# Altium PCB ToF_Sensor_Hub.PcbDoc
Units mm, origin at the board's own origin, x right, y up, seen from the top; angles counter-clockwise.
Board outline 30 x 30 mm, 2 copper layers (Top Layer, Bottom Layer); 24 components, 16 nets, 89 pads, 67 vias.
Unrouted connection lines stored in the file: 8.
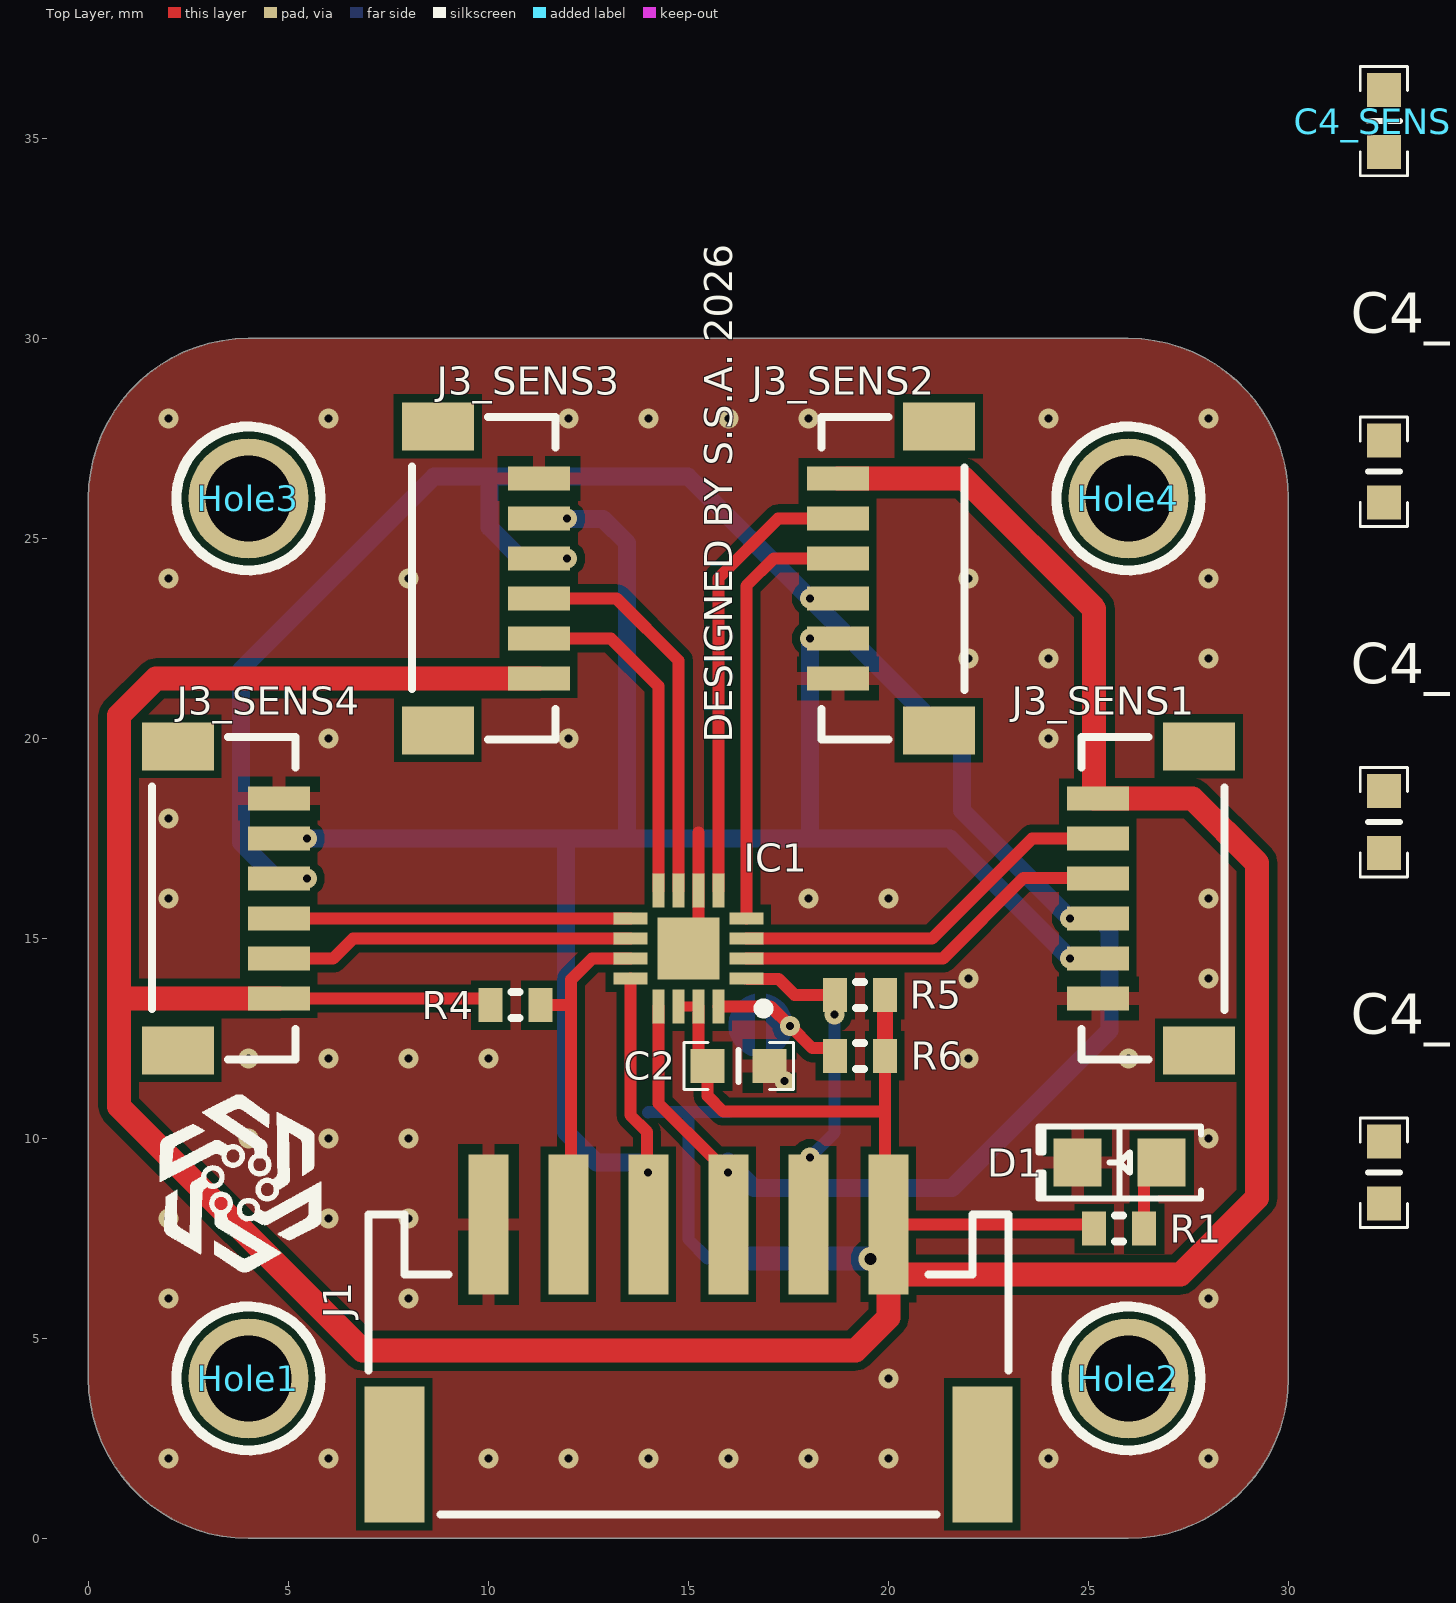
[diagram p0: Top Layer view]
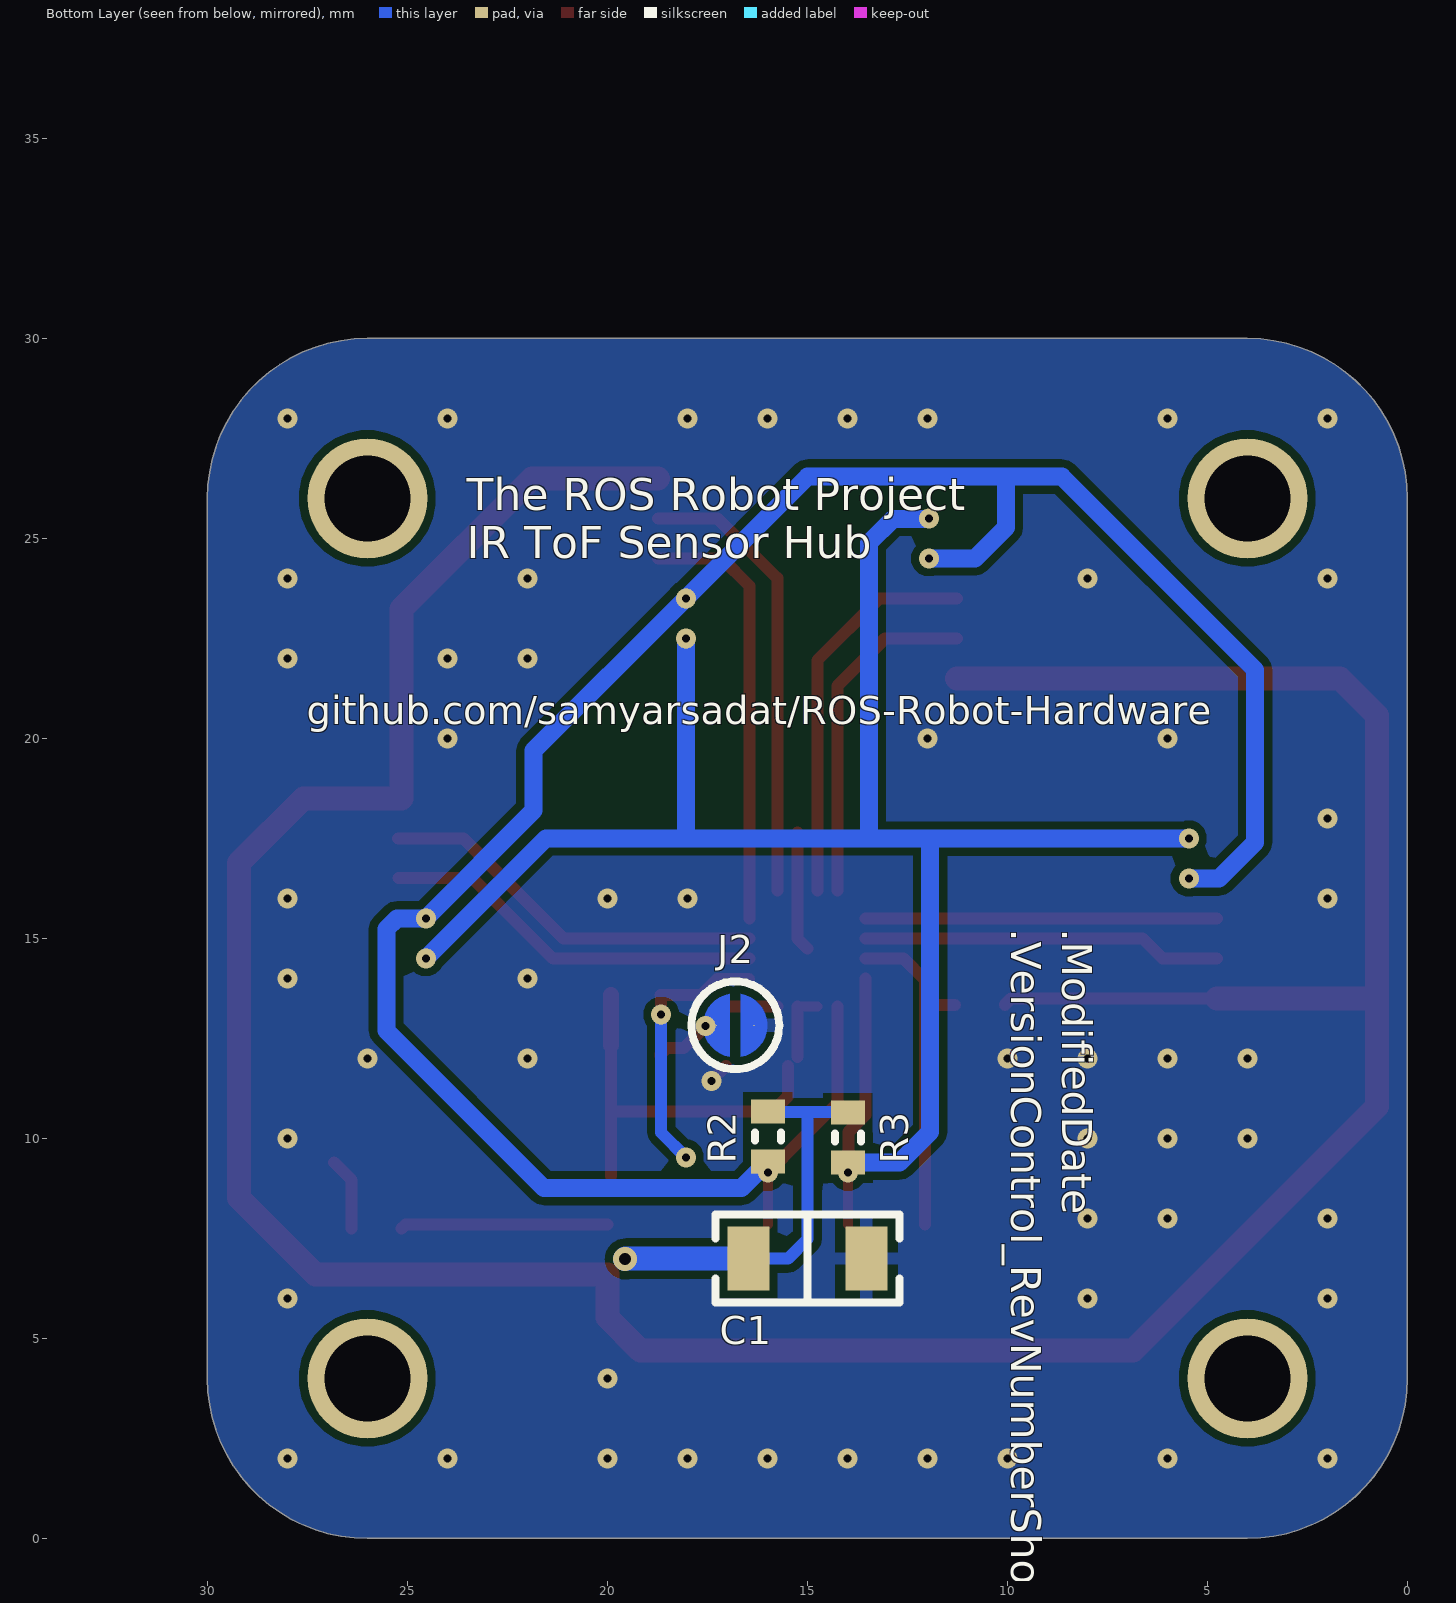
[diagram p1: Bottom Layer view, seen from below]

## Layer stack, top to bottom
Top Solder: solder mask 0.0102, Solder Resist, Dk 3.5
Top Layer: signal copper 0.0356
Dielectric 1: dielectric 0.32, FR-4, Dk 4.8
Bottom Layer: signal copper 0.0356
Bottom Solder: solder mask 0.0102, Solder Resist, Dk 3.5

## Board outline
4,0 cw(c4,4) 0,4 0,26 cw(c4,26) 4,30 26,30 cw(c26,26) 30,26 30,4.064 30,4 cw(c26,4) 26,0

## Design rules (kind name [scope] priority, off if disabled: settings)
BoardOutlineClearance [All] p1: gap=0.2 ignorepadtopadclearanceinfootprint=FALSE except(0: Fill-OutlineEdge Fill-CavityEdge Fill-CutoutEdge Fill-SplitBarrior Fill-SplitContinuation Poly-OutlineEdge Poly-CavityEdge Poly-CutoutEdge Poly-SplitBarrior Poly-SplitContinuation Region-OutlineEdge Region-CavityEdge Region-CutoutEdge Region-SplitBarrior Region-SplitContinuation; 0.15: Text-OutlineEdge Text-CavityEdge Text-CutoutEdge Text-SplitBarrior Text-SplitContinuation)
Clearance "Stitching GND" [IsStitchingVia and InNet('GND') vs (IsVia and (Not IsStitchingVia)) Or IsPad] p1: gap=0.2 ignorepadtopadclearanceinfootprint=FALSE except(0.28: Arc-Hole Track-Hole)
Clearance [All] p2: gap=0.2 ignorepadtopadclearanceinfootprint=TRUE except(0.28: Arc-Hole Track-Hole)
DiffPairsRouting [All] p1: maxlimit=0.254 minlimit=0.254 mostfreqgap=0.254 toplayer_minwidth=0.381 toplayer_maxwidth=0.5 toplayer_prefwidth=0.4 bottomlayer_minwidth=0.381 bottomlayer_maxwidth=0.5 bottomlayer_prefwidth=0.4 maxuncoupledlength=12.7
HoleSize [All] p1: absolutevalues=TRUE maxlimit=6 minlimit=0.15 maxpercent=80.000 minpercent=20.000
HoleToHoleClearance [All] p1: gap=0.2 allowstackedmicrovias=TRUE
MinimumAnnularRing MinimumViaAnnularRing [IsVia] p1: minimumring=0.15
MinimumAnnularRing [All] p2: minimumring=0.2
MinimumSolderMaskSliver [Not HasCompParameter('FinePitchPads')] p1: minsoldermaskwidth=0.1
PlaneConnect [All] p1: planeconnectstyle=Relief reliefexpansion=0.508 reliefentries=4 reliefconductorwidth=0.32 reliefairgap=0.254
PolygonConnect GNDStitchingDirect [InNet('GND')] p1: thpad.connectstyle=Relief thpad.reliefconductorwidth=0.32 thpad.reliefentries=4 thpad.polygonreliefangle="90 Angle" thpad.airgapwidth=0.254 thpad.conductorbypadedge=TRUE thpad.mindistance=0.381 thpad.enablemindistance=FALSE smdpad.connectstyle=Relief smdpad.reliefconductorwidth=0.32 smdpad.reliefentries=4 smdpad.polygonreliefangle="90 Angle" smdpad.airgapwidth=0.254 smdpad.conductorbypadedge=TRUE smdpad.mindistance=0.381 smdpad.enablemindistance=FALSE via.connectstyle=Direct via.reliefconductorwidth=0.254 via.reliefentries=4 via.polygonreliefangle="90 Angle" via.airgapwidth=0.254
PolygonConnect [All] p2: connectstyle=Relief reliefconductorwidth=0.32 reliefentries=4 polygonreliefangle="90 Angle" conductorbypadedge=TRUE mindistance=0.381 enablemindistance=FALSE airgapwidth=0.254
RoutingVias [All] p1: holewidth=0.4 width=0.8 viastyle="Through Hole" minholewidth=0.2 minwidth=0.5 maxholewidth=0.8 maxwidth=1.5
SilkToSilkClearance [All] p1: silktosilkclearance=0.1
SilkToSolderMaskClearance [IsPad] p1: minsilkscreentomaskgap=0.1 clearancetoexposedcopper=TRUE
SolderMaskExpansion [All] p1: expansion=0.04 istentingtop=FALSE
SupplyNets "Schematic Supply Nets" [InNet('+3V3')] p1: voltage=3.300
SupplyNets "Schematic Supply Nets_1" [InNet('GND')] p2: voltage=0.000
UnRoutedNet [All] p1: checkbadconnections=TRUE
Width [All] p1: maxlimit=1.4 minlimit=0.254 preferedwidth=0.6
22 further rules are at their usual default settings.

## Classes and differential pairs
channel class Sensor_Connector: SENS1 SENS2 SENS3 SENS4
component class SENS4: C4_SENS4 J3_SENS4
component class SENS3: C4_SENS3 J3_SENS3
component class SENS2: C4_SENS2 J3_SENS2
component class SENS1: C4_SENS1 J3_SENS1
component class ToF_Sensor_Hub: C1 C2 D1 Hole1 Hole2 Hole3 Hole4 IC1 J1 J2 R1 R2 R3 R4 R5 R6

## Components (designator, comment, footprint, x,y, rotation, side; value= is the part's Value field where it differs from the comment)
C1 "100uF" "MURATA CAP GRM31C 1206_3216" 15,7 r0 bottom
C2 "100nF" CAP_SMD_603 16.256,11.811 r180 top
C4_SENS1 "1uF" CAP_SMD_603 32.385,9.144 r90 top (schematic designator C4)
C4_SENS2 "1uF" CAP_SMD_603 32.385,17.907 r90 top (schematic designator C4)
C4_SENS3 "1uF" CAP_SMD_603 32.385,26.67 r90 top (schematic designator C4)
C4_SENS4 "1uF" CAP_SMD_603 32.385,35.433 r90 top (schematic designator C4)
D1 "LED" "LED 0805_2012 RED" 25.781,9.398 r180 top
Hole1 "Hole" Hole_2mm 4,4 r0 top locked
Hole2 "Hole" Hole_2mm 26,4 r0 top locked
Hole3 "Hole" Hole_2mm 4,26 r0 top locked
Hole4 "Hole" Hole_2mm 26,26 r0 top locked
IC1 "TCA6408ARGTR" QFN50P300X300X100-17N-D 15,14.75 r180 top
J1 "S6B-PH-SM4-TB(LF)(SN)" "JST S6B-PH-SM4-TB" 15,3.6 r180 top locked
J2 "Jumper Pad" "Jumper Pad" 16.803,12.827 r180 bottom
J3_SENS1 "BM06B-SRSS-TB(LF)(SN)" "JST BM06B-SRSS-TB" 26.5,16 r270 top locked (schematic designator J3)
J3_SENS2 "BM06B-SRSS-TB(LF)(SN)" "JST BM06B-SRSS-TB" 20,24 r270 top locked (schematic designator J3)
J3_SENS3 "BM06B-SRSS-TB(LF)(SN)" "JST BM06B-SRSS-TB" 10,24 r90 top locked (schematic designator J3)
J3_SENS4 "BM06B-SRSS-TB(LF)(SN)" "JST BM06B-SRSS-TB" 3.5,16 r90 top (schematic designator J3)
R1 "2.2k" RES_0603 25.146,7.747 r0 top
R2 "10k" RES_0603 15.984,10.668 r270 bottom
R3 "10k" RES_0603 13.984,10.642 r270 bottom
R4 "10k" RES_0603 11.303,13.335 r180 top
R5 "10k" RES_0603 18.669,13.589 r0 top
R6 "47k" RES_0603 18.669,12.065 r0 top

## Footprints (in the part's own frame and the unit in brackets; to place one, negate y for a bottom-side part, rotate by r counter-clockwise, add the part's x,y. Pads: shape width x height; smd on the part's side, far side on the other; paste and mask are expansions set on the pad)
CAP_SMD_603 [mm]
  rect 0.85x0.85 smd: 1(-0.775,0) 2(0.775,0)
  silkscreen extent -1.37,-0.59 1.37,0.59, body extent -0.8,-0.4 0.8,0.4, height 0.9
Hole_2mm [mm]
  round 3 hole 2.15: 1(0,0)
  silkscreen extent -1.8,-1.8 1.8,1.8
"JST BM06B-SRSS-TB" [mm] "1.0mm pitch/Disconnectable Crimp style connector"
  rect 0.6x1.55 smd: 1(-2.5,-1.262) 2(-1.5,-1.262) 3(-0.5,-1.262) 4(0.5,-1.262) 5(1.5,-1.262) 6(2.5,-1.262)
  rect 1.2x1.8 smd: M(-3.8,1.262) M(3.8,1.262)
  silkscreen extent -4.03,-1.68 4.03,1.91, body extent -4,-1.69 4,1.91, height 4.32
"JST S6B-PH-SM4-TB" [mm] "JST PH Series 2mm pitch, side entry connector"
  rect 1x3.5 smd: 1(-5,-4.25) 2(-3,-4.25) 3(-1,-4.25) 4(1,-4.25) 5(3,-4.25) 6(5,-4.25)
  rect 1.5x3.4 smd: M(-7.35,1.5) M(7.35,1.5)
  silkscreen extent -8,-4.5 8,3, body extent -7.95,-5.6 7.95,3.01, height 5.6
"Jumper Pad" [mil]
  round 1 smd: 1(-18.48,0) 2(18.48,0)
  Top Layer region: 5.47,-31.02 5.47,31.02 18.81,25.26 28.15,14.14 31.5,0 28.15,-14.14 18.81,-25.26 5.47,-31.02
  Top Layer region: -5.47,-31.02 -18.81,-25.26 -28.15,-14.14 -31.5,0 -28.15,14.14 -18.81,25.26 -5.47,31.02 -5.47,31.02
  silkscreen extent -43,-43 43,43
"LED 0805_2012 RED" [mm] "Chip Diode, 2-Leads, Body 2.00x1.25mm, IPC Medium Density"
  rect 1.2x1.2 smd: 1(-1.05,0) 2(1.05,0)
  silkscreen extent -2.03,-0.9 2.03,0.9, body extent -1,-0.62 1,0.63, height 0.9
"MURATA CAP GRM31C 1206_3216" [mm] "Chip Capacitor, 2-Leads, Body 3.25x1.60mm"
  rect 1.05x1.6 smd: 1(-1.475,0) 2(1.475,0)
  silkscreen extent -2.3,-1.1 2.3,1.1, body extent -1.6,-0.8 1.6,0.8, height 1.6
QFN50P300X300X100-17N-D [mm]
  rect 0.85x0.3 smd: 1(-1.45,0.75) 2(-1.45,0.25) 3(-1.45,-0.25) 4(-1.45,-0.75) 9(1.45,-0.75) 10(1.45,-0.25) 11(1.45,0.25) 12(1.45,0.75)
  rect 0.3x0.85 smd: 5(-0.75,-1.45) 6(-0.25,-1.45) 7(0.25,-1.45) 8(0.75,-1.45) 13(0.75,1.45) 14(0.25,1.45) 15(-0.25,1.45) 16(-0.75,1.45)
  rect 1.55x1.55 smd: 17(0,0)
  silkscreen extent -2,1.38 -1.75,1.62, body extent -1.5,-1.5 1.5,1.5, height 1
RES_0603 [mm]
  rect 0.6x0.85 smd: 1(0,0) 2(1.244,0)
  silkscreen extent 0.52,-0.33 0.72,0.33, body extent -0.14,-0.38 1.38,0.38, height 0.45

## Part data
C1: library part GRM31CR60J107KEA8L, "CAP CER 100UF 6.3V X5R 1206", Device Package="1206 (3216 Metric)", Manufacturer="Murata Electronics", Operating Temperature="-55°C ~ 85°C", Supplier Part Number 1=490-GRM31CR60J107KEA8LCT-ND, Temperature Coefficient=X5R, Tolerance=±10%, Voltage - Rated=6.3V, Applications="General Purpose", ComponentLink1Description=Datasheet, ComponentLink1URL=https://search.murata.co.jp/Ceramy/image/img/A01X/G101/ENG/GRM31CR60J107KEA8-01A.pdf, ComponentLink2Description="DigiKey Link", ComponentLink2URL=https://www.digikey.com/en/products/detail/murata-electronics/GRM31CR60J107KEA8L/16286000, LastUpdated="7/27/2025 6:13:50 AM", Lifecycle Status=Active, Minimum Order=1, Mounting Type="Surface Mount, MLCC", Package / Case="1206 (3216 Metric)", Packaging=TapeAndReel, Part Number=GRM31CR60J107KEA8L, Part Status=Active, PartId=42924, Price=0.10, Series=GRM, Size / Dimension="0.126\" L x 0.063\" W (3.20mm x 1.60mm)", Supplier 1=DigiKey, Thickness (Max)="0.075\" (1.90mm)"
C2 C4_SENS1 C4_SENS2 C4_SENS3 C4_SENS4: library part "Non-polar Capacitor", "Generic Ceramic Capacitor", Voltage=6.3V
D1: "Indicator LED", Color=Red
IC1: "Integrated Circuit", Manufacturer_Name="Texas Instruments", Mouser Part Number=595-TCA6408ARGTR, Arrow Part Number=TCA6408ARGTR, Arrow Price/Stock=https://www.arrow.com/en/products/tca6408argtr/texas-instruments?region=nac, Datasheet Link=https://www.ti.com/lit/ds/symlink/tca6408a.pdf?HQS=dis-dk-null-digikeymode-dsf-pf-null-wwe&ts=1650414321322&ref_url=https%253A%252F%252Fwww.ti.com%252Fgeneral%252Fdocs%252Fsuppproductinfo.tsp%253FdistId%253D10%2526gotoUrl%253Dhttps%253A%252F%252Fwww.ti.co, Height=1mm, Manufacturer_Part_Number=TCA6408ARGTR, Mouser Price/Stock=https://www.mouser.co.uk/ProductDetail/Texas-Instruments/TCA6408ARGTR?qs=I4smPnw5um2xBJN3iV2JIg%3D%3D
J1: "CONN HEADER SMD R/A 6POS 2MM", Current Rating (Amps)=2A, Insulation Color=Natural, Manufacturer="JST Sales America Inc.", Material Flammability Rating="UL94 V-0", Operating Temperature="-25°C ~ 85°C", Supplier Part Number 1=455-1753-1-ND, Voltage Rating=100V, ComponentLink1Description=Datasheet, ComponentLink1URL=http://www.jst-mfg.com/product/pdf/eng/ePH.pdf, ComponentLink2Description="DigiKey Link", ComponentLink2URL=http://digikey.com/product-detail/en/jst-sales-america-inc/S6B-PH-SM4-TB-LF-SN/455-1753-1-ND/926850, Connector Type=Header, Contact Finish - Mating=Tin, Contact Finish - Post=Tin, Contact Length - Mating="0.130\" (3.30mm)", Contact Material="Copper Alloy", Contact Shape=Square, Contact Type="Male Pin", Fastening Type="Detent Lock", Features="Solder Retention", Insulation Height="0.217\" (5.51mm)", Insulation Material="Polyamide (PA6T), Nylon 6T", LastUpdated="1/15/2020 3:38:11 AM", Lifecycle Status=Active, Minimum Order=1, Mounting Type="Surface Mount, Right Angle", Number of Positions=6, Number of Positions Loaded=All, Number of Rows=1, Packaging=TapeAndReel, Part Number=S6B-PH-SM4-TB(LF)(SN), Part Status=Active, PartId=112, Pitch - Mating="0.079\" (2.00mm)", Price=0.45, Series=PH, Shrouding="Shrouded - 4 Wall", Style="Board to Cable/Wire", Supplier 1=DigiKey, Termination=Solder
J3_SENS1 J3_SENS2 J3_SENS3 J3_SENS4: "CONN HEADER SMD 6POS 1MM", Current Rating (Amps)=0.7A, Insulation Color=Natural, Manufacturer="JST Sales America Inc.", Material Flammability Rating="UL94 V-0", Operating Temperature="-25°C ~ 85°C", Supplier Part Number 1=455-1792-1-ND, Voltage Rating=50V, ComponentLink1Description=Datasheet, ComponentLink1URL=http://www.jst-mfg.com/product/pdf/eng/eSH.pdf, ComponentLink2Description="DigiKey Link", ComponentLink2URL=http://digikey.com/product-detail/en/jst-sales-america-inc/BM06B-SRSS-TB-LF-SN/455-1792-1-ND/926863, Connector Type=Header, Contact Finish - Mating=Tin, Contact Finish - Post=Tin, Contact Material="Copper Alloy", Contact Shape=Square, Contact Type="Male Pin", Fastening Type=Push-Pull, Features="Solder Retention", Insulation Height="0.167\" (4.25mm)", Insulation Material="Polyamide (PA), Nylon", LastUpdated="1/12/2020 10:14:30 PM", Lifecycle Status=Active, Minimum Order=1, Mounting Type="Surface Mount", Number of Positions=6, Number of Positions Loaded=All, Number of Rows=1, Packaging=TapeAndReel, Part Number=BM06B-SRSS-TB(LF)(SN), Part Status=Active, PartId=20, Pitch - Mating="0.039\" (1.00mm)", Price=0.38, Series=SR, Shrouding="Shrouded - 4 Wall", Style="Board to Cable/Wire", Supplier 1=DigiKey, System=Connector, Termination=Solder
R1 R2 R3 R4 R5 R6: library part Resistor, "Generic Resistor", Power=1/8W

## Via types
v1: diameter 0.5, hole 0.2, Top Layer to Bottom Layer, tented both sides, 52 vias
v2: diameter 0.5, hole 0.2, Top Layer to Bottom Layer, 14 vias
v3: diameter 0.6, hole 0.3, Top Layer to Bottom Layer, 1 vias

## Nets (pads, with @x,y where several pads share a name; then routed paths per layer and width w, separated by ;. In a path a pad name is that pad's centre, name@x,y a point inside that pad or via, vN(x,y) a via of type N, cw(c..) or ccw(c..) an arc to the next point about the centre after c; other vN are vias at no path point)
+3V3: C1.2 C2.2 C4_SENS1.2 C4_SENS2.2 C4_SENS3.2 C4_SENS4.2 IC1.14 IC1.15 J1.1 J3_SENS1.1 J3_SENS2.1 J3_SENS3.1 J3_SENS4.1 R1.1 R2.1 R3.1 R4.2 R5.2 R6.2 | length 115.6
  Top Layer w0.254: IC1.14 IC1.15
  Top Layer w0.3: J3_SENS4.1 9.909,13.5 10.059,13.35 R4.2 ; C2.2@15.25,12.042 IC1.15 ; C2.2 15.481,11.062 15.875,10.668 19.913,10.668 ; J1.1@19.913,9.065 19.913,10.668 ; R6.2@19.913,12.319 19.913,10.668 ; J1.1 25.043,7.85 R1.1
  Top Layer w0.4: R6.2@19.913,12.319 R5.2
  Top Layer w0.6: J3_SENS4.1 0.851,13.5 0.762,13.589 ; J3_SENS3.1 1.688,21.5 0.762,20.574 0.762,13.589 ; J3_SENS2.1 21.887,26.5 25.146,23.241 25.146,18.5 J3_SENS1.1 27.601,18.5 29.21,16.891 29.21,8.509 27.301,6.6 20,6.6 20,5.522 19.177,4.699 6.858,4.699 0.762,10.795 0.762,13.589
  Bottom Layer w0.3: R3.1 13.997,10.655 14.998,10.655 ; R2.1@16,10.655 14.998,10.655 ; C1.2 15.479,7 14.998,7.481 14.998,10.655
  Bottom Layer w0.6: C1.2 19.543,7 v3(19.558,6.985)
GND: C1.1 C2.1 C4_SENS1.1 C4_SENS2.1 C4_SENS3.1 C4_SENS4.1 D1.2 IC1.6 IC1.17 J1.6 J2.2 J3_SENS1.6 J3_SENS2.6 J3_SENS3.6 J3_SENS4.6 | length 3.5
  Top Layer w0.3: IC1.17 15.25,15 IC1.6 15.25,17.643 ; C2.1 17.399,11.443 v2(17.399,11.43)
  other v1: 2,2 6,2 10,2 12,2 14,2 16,2 18,2 20,2 24,2 28,2 20,4 2,6 8,6 28,6 2,8 6,8 8,8 4,10 6,10 8,10 28,10 4,12 6,12 8,12 10,12 22,12 26,12 22,14 28,14 2,16 18,16 20,16 28,16 2,18 6,20 12,20 24,20 22,22 24,22 28,22 2,24 8,24 22,24 28,24 2,28 6,28 12,28 14,28 16,28 18,28 24,28 28,28
I2C.SCL: IC1.12 J1.4 J3_SENS1.5 J3_SENS2.5 J3_SENS3.5 J3_SENS4.5 R3.2 | length 50.5
  Top Layer w0.254: J1.4@13.97,9.158 v2(13.984,9.144) J1.4@13.984,7.85
  Top Layer w0.3: IC1.12 13.55,10.58 13.97,10.16 J1.4@13.97,9.158
  Bottom Layer w0.45: v2(5.461,17.5) 11.938,17.5 ; v2(11.961,25.5) 11.971,25.49 12.864,25.49 13.462,24.892 13.462,17.5 ; R3.2 12.7,9.398 11.938,10.16 11.938,17.5 ; v2(18.039,22.5) 18.039,17.505 18.034,17.5 ; v2(24.539,14.5) 21.539,17.5 18.034,17.5 ; 11.938,17.5 13.462,17.5 ; 13.462,17.5 18.034,17.5
I2C.SDA: IC1.13 J1.3 J3_SENS1.4 J3_SENS2.4 J3_SENS3.4 J3_SENS4.4 R2.2 | length 59.4
  Top Layer w0.254: J1.3@15.627,9.501 15.627,9.473 15.956,9.144 v2(15.984,9.144) J1.3@15.984,7.85
  Top Layer w0.3: IC1.13 14.25,10.878 J1.3@15.627,9.501
  Bottom Layer w0.45: v2(5.461,16.5) 4.709,16.5 3.81,17.399 3.81,21.717 8.636,26.543 10.033,26.543 ; v2(11.961,24.5) 10.806,24.5 10.033,25.273 10.033,26.543 ; R2.2 R2.2@16.124,9.284 ; R2.2@16.124,9.349 16.184,9.349 16.184,9.224 16.645,8.763 21.59,8.763 25.527,12.7 25.527,15.236 25.263,15.5 v2(24.539,15.5) 21.844,18.195 21.844,19.695 v2(18.039,23.5) 14.996,26.543 10.033,26.543
INT_OUT: IC1.11 J1.5 R4.1 | length 8.6
  Top Layer w0.3: R4.1 12.065,13.335 ; J1.5@12.065,7.85 12.065,13.335 ; IC1.11 12.595,14.5 12.065,13.97 12.065,13.335
INT_S1: IC1.3 J3_SENS1.2 | length 9.8
  Top Layer w0.3: IC1.3 21.096,15 23.596,17.5 J3_SENS1.2
INT_S2: IC1.5 J3_SENS2.2 | length 11.4
  Top Layer w0.3: IC1.5 15.75,24.005 17.245,25.5 J3_SENS2.2
INT_S3: IC1.8 J3_SENS3.2 | length 8.6
  Top Layer w0.3: J3_SENS3.2 13.06,22.5 14.25,21.31 IC1.8
INT_S4: IC1.10 J3_SENS4.2 | length 9
  Top Layer w0.3: J3_SENS4.2 6.118,14.5 6.618,15 IC1.10
IO_RST: IC1.1 J1.2 R5.1 | length 6.7
  Top Layer w0.254: IC1.1 IC1.1@16.464,13.986
  Top Layer w0.3: IC1.1@16.464,13.986 17.256,13.986 17.653,13.589 R5.1 18.661,13.581 18.661,13.105 v2(18.653,13.097)
  Bottom Layer w0.3: v2(18.034,9.525) 18.653,10.144 v2(18.653,13.097)
NetD1_1: D1.1 R1.2 | length 1.8
  Top Layer w0.3: R1.2 26.393,7.75 26.393,8.96 D1.1
NetIC1_16: IC1.16 J2.1 R6.1 | length 3.5
  Top Layer w0.3: IC1.16 17.053,13.3 v2(17.544,12.81) 18.098,12.255 18.519,12.255 18.669,12.105 R6.1
XSHUT_S1: IC1.2 J3_SENS1.3 | length 9.6
  Top Layer w0.254: J3_SENS1.3@25.227,16.51 J3_SENS1.3
  Top Layer w0.3: IC1.2 21.365,14.5 23.375,16.51 J3_SENS1.3@25.227,16.51
XSHUT_S2: IC1.4 J3_SENS2.3 | length 10.9
  Top Layer w0.3: IC1.4 16.45,23.816 17.134,24.5 J3_SENS2.3
XSHUT_S3: IC1.7 J3_SENS3.3 | length 9.9
  Top Layer w0.3: J3_SENS3.3 13.203,23.5 14.75,21.953 IC1.7
XSHUT_S4: IC1.9 J3_SENS4.3 | length 8.8
  Top Layer w0.3: J3_SENS4.3 IC1.9
pads on no net: Hole1.1 Hole2.1 Hole3.1 Hole4.1 J1.M J3_SENS1.M J3_SENS2.M J3_SENS3.M J3_SENS4.M

## Polygon pours and split planes (outlines as drawn)
GND on Bottom Layer "GND_L02_P002" (solid, remove dead copper, pour order 2): 4,0 cw(c4,4) 0,4 0,26 cw(c4,26) 4,30 26,30 cw(c26,26) 30,26 30,4.064 30,4 cw(c26,4) 26,0
GND on Top Layer "GND_L01_P001" (solid, remove dead copper, pour order 1): 4,0 cw(c4,4) 0,4 0,26 cw(c4,26) 4,30 26,30 cw(c26,26) 30,26 30,4.064 30,4 cw(c26,4) 26,0

## Silkscreen, mask and mechanical layers (free items; w line width, h text height)
Top Overlay:
  drawing of 6 lines, arcs and shapes, not listed
  text "DESIGNED BY S.S.A. 2026" at 16.1,19.897 h0.7 r90
Bottom Overlay:
  text "The ROS Robot Project / IR ToF Sensor Hub" at 23.509,24.5 h0.8
  text "github.com/samyarsadat/ROS-Robot-Hardware" at 27.514,20.353 h0.7
  text ".ModifiedDate" at 8.623,15.247 h0.75 r90
  text ".VersionControl_RevNumberShort" at 9.897,15.247 h0.75 r90
Mechanical 1:
  lines w0.254: 30,4 cw(c26,4) 26,0 4,0 cw(c4,4) 0,4 0,26 cw(c4,26) 4,30 26,30 cw(c26,26) 30,26 30,4.064